# Altium PCB poria_khosravi.PcbDoc
Units mm, origin at the board's own origin, x right, y up, seen from the top; angles counter-clockwise.
Board outline 94.23 x 46.48 mm, 2 copper layers (Top Layer, Bottom Layer); 26 components, 22 nets, 110 pads, 12 vias.
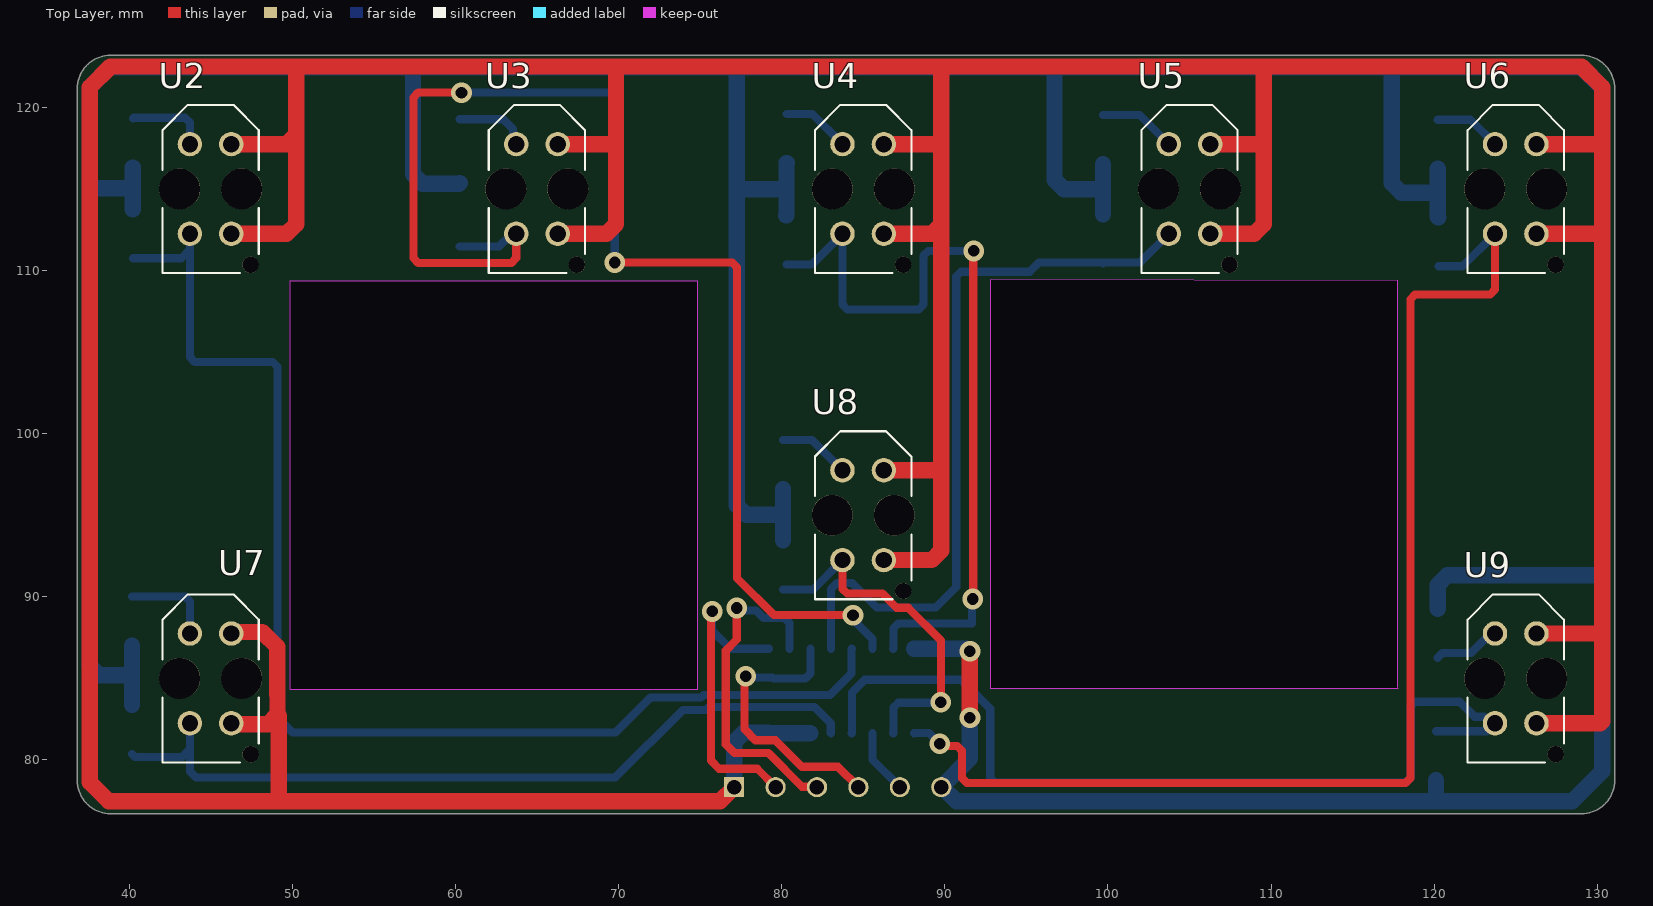
[diagram p0: Top Layer view]
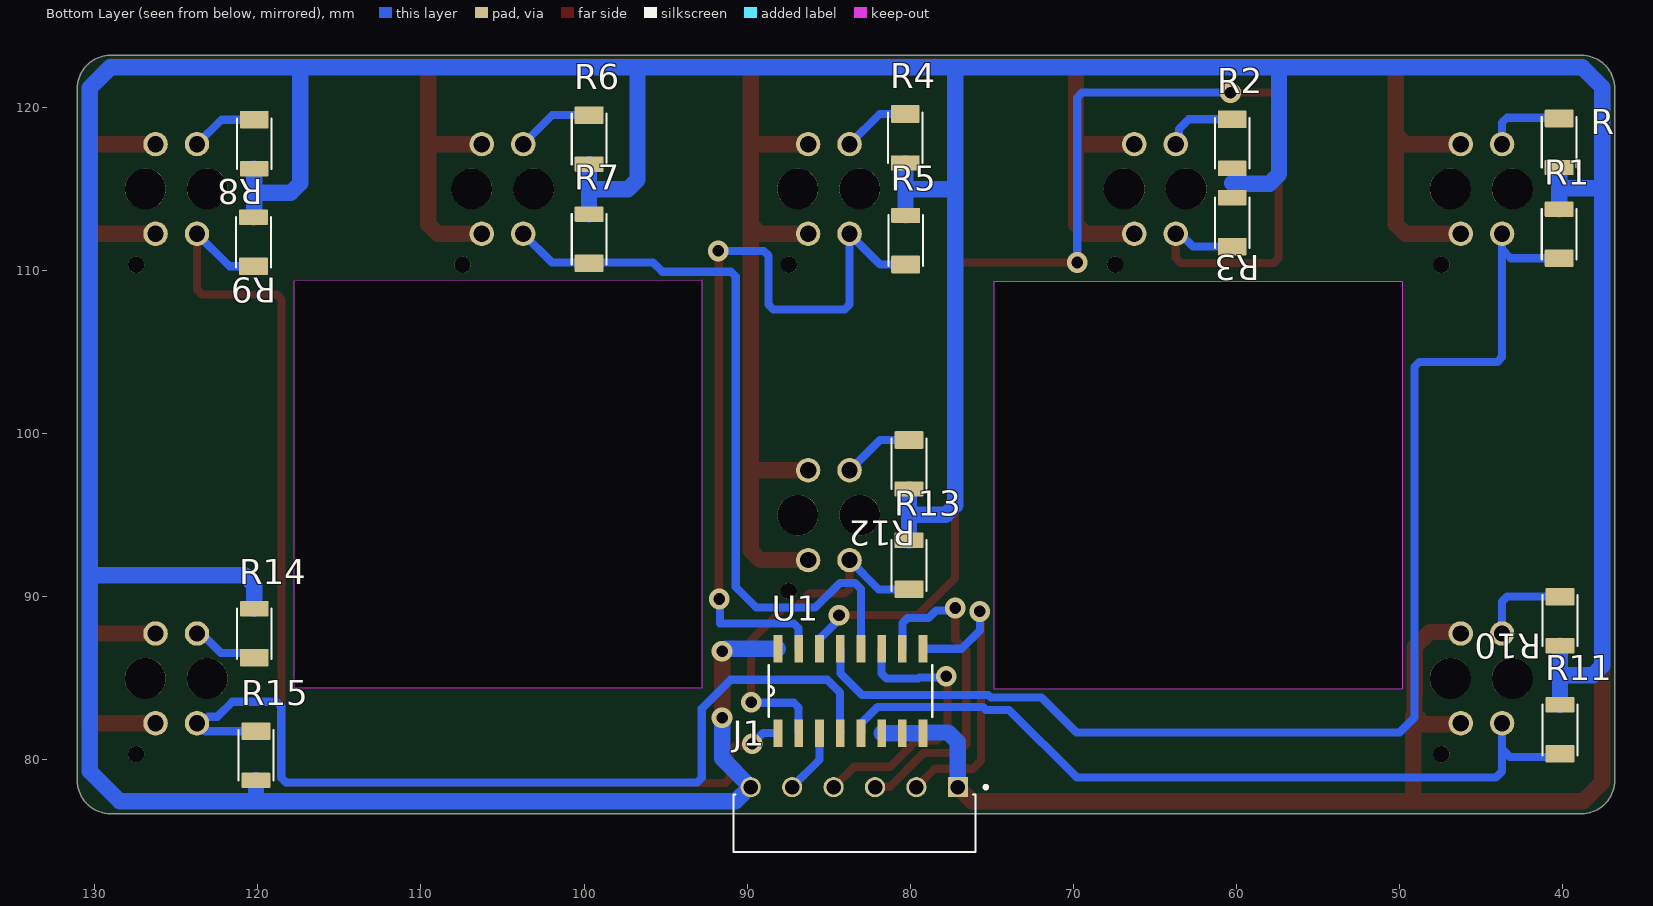
[diagram p1: Bottom Layer view, seen from below]
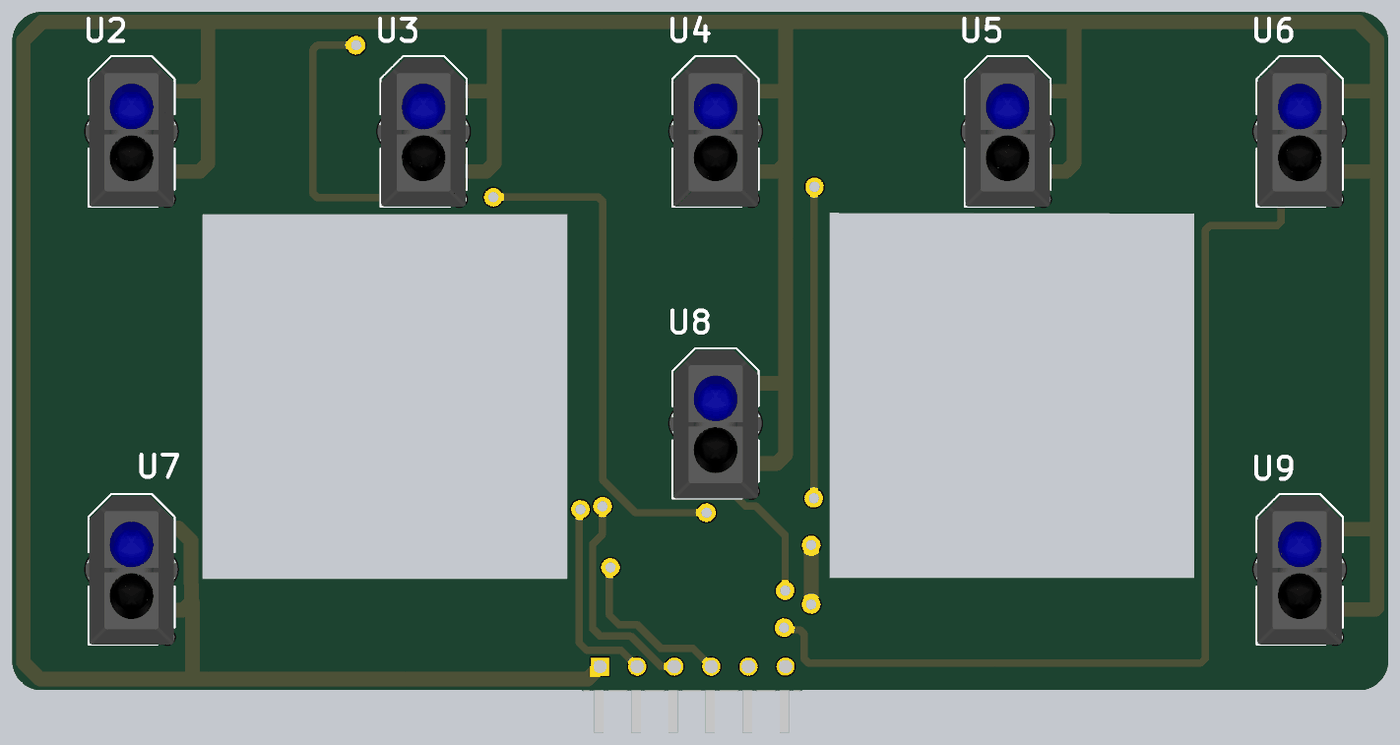
[diagram p2: 3D render of the assembled board from above, using the file's embedded part models]
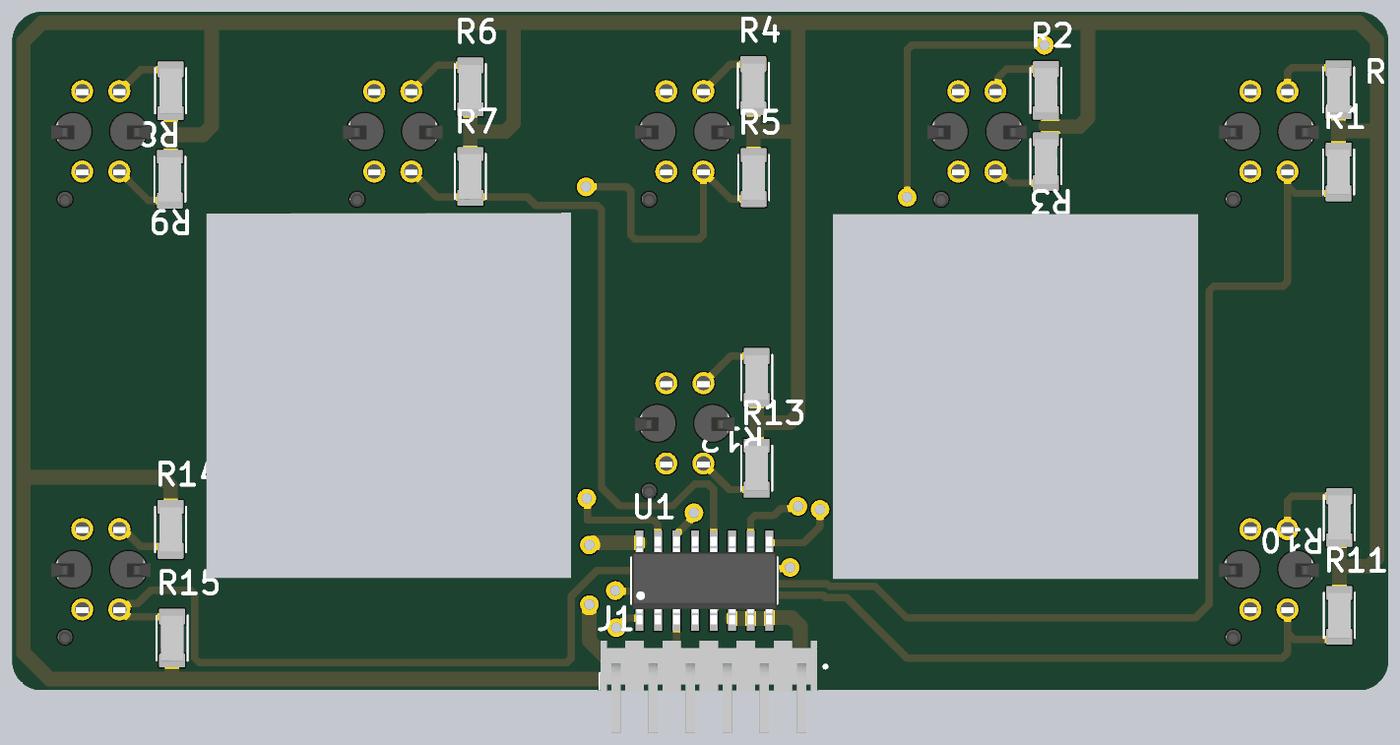
[diagram p3: 3D render of the assembled board from below, using the file's embedded part models]

## Layer stack, top to bottom
Top Solder: solder mask 0.0102, Solder Resist, Dk 3.5
Top Layer: signal copper 0.0356
Dielectric 1: dielectric 0.32, FR-4, Dk 4.8
Bottom Layer: signal copper 0.0356
Bottom Solder: solder mask 0.0102, Solder Resist, Dk 3.5

## Board outline
36.83,78.74 36.83,121.158 cw(c38.862,121.158) 38.862,123.19 129.032,123.19 cw(c129.032,121.158) 131.064,121.158 131.064,78.74 cw(c129.032,78.74) 129.032,76.708 38.862,76.708 cw(c38.862,78.74)
cut-out: 92.786,109.423 92.786,84.404 117.805,84.404 117.764,84.446 117.764,109.378
cut-out: 49.835,109.347 49.835,84.328 74.854,84.328 74.854,109.347

## Design rules (kind name [scope] priority, off if disabled: settings)
Clearance [All] p1: gap=0.254 ignorepadtopadclearanceinfootprint=FALSE except(0: Arc-Hole Track-Hole SMDPad-Hole THPad-Hole Via-Hole Fill-Hole Poly-Hole Region-Hole Text-Hole)
PolygonConnect [All] p1: connectstyle=Relief reliefconductorwidth=0.254 reliefentries=4 polygonreliefangle="90 Angle" airgapwidth=0.254
RoutingVias [All] p1: holewidth=0.711 width=1.27 viastyle="Through Hole" minholewidth=0.711 minwidth=1.27 maxholewidth=0.711 maxwidth=1.27
SolderMaskExpansion [All] p1: expansion=0.102 istentingtop=FALSE
Width [All] p1: maxlimit=2 minlimit=0.5 preferedwidth=1 minimp=50.000000 maximp=50.000000 favimp=50.000000
30 further rules are at their usual default settings.

## Components (designator, comment, footprint, x,y, rotation, side; value= is the part's Value field where it differs from the comment)
J1 "5-2267064-6" TE_5-2267064-6 77.089,78.334 r0 bottom
R "2-1879462-9" RESC3115X65N 40.234,117.856 r270 bottom
R1 "2-1879462-9" RESC3115X65N 40.234,112.217 r90 bottom
R2 "2-1879462-9" RESC3115X65N 60.274,117.805 r270 bottom
R3 "2-1879462-9" RESC3115X65N 60.274,112.928 r90 bottom
R4 "2-1879462-9" RESC3115X65N 80.315,118.135 r270 bottom
R5 "2-1879462-9" RESC3115X65N 80.289,111.836 r90 bottom
R6 "2-1879462-9" RESC3115X65N 99.695,118.059 r270 bottom
R7 "2-1879462-9" RESC3115X65N 99.695,111.912 r90 bottom
R8 "2-1879462-9" RESC3115X65N 120.218,117.78 r270 bottom
R9 "2-1879462-9" RESC3115X65N 120.269,111.726 r90 bottom
R10 "2-1879462-9" RESC3115X65N 40.183,88.544 r270 bottom
R11 "2-1879462-9" RESC3115X65N 40.183,81.839 r90 bottom
R12 "2-1879462-9" RESC3115X65N 80.086,98.146 r270 bottom
R13 "2-1879462-9" RESC3115X65N 80.086,91.923 r90 bottom
R14 "2-1879462-9" RESC3115X65N 120.218,87.732 r90 bottom
R15 "2-1879462-9" RESC3115X65N 120.117,80.289 r270 bottom
U1 "74HC4051D" SOIC127P600X175-16N 83.668,84.226 r90 bottom
U2 "TCRT5000" OPTO_TCRT5000 45,115 r90 top locked
U3 "TCRT5000" OPTO_TCRT5000 65,115 r90 top locked
U4 "TCRT5000" OPTO_TCRT5000 85,115 r90 top locked
U5 "TCRT5000" OPTO_TCRT5000 105,115 r90 top locked
U6 "TCRT5000" OPTO_TCRT5000 125,115 r90 top locked
U7 "TCRT5000" OPTO_TCRT5000 45,85 r90 top locked
U8 "TCRT5000" OPTO_TCRT5000 85,95 r90 top locked
U9 "TCRT5000" OPTO_TCRT5000 125,85 r90 top

## Footprints (in the part's own frame and the unit in brackets; to place one, negate y for a bottom-side part, rotate by r counter-clockwise, add the part's x,y. Pads: shape width x height; smd on the part's side, far side on the other; paste and mask are expansions set on the pad)
OPTO_TCRT5000 [mm]
  round 1.5 hole 1: A(2.75,1.27) CATH(2.75,-1.27) COLL(-2.75,1.27) E(-2.75,-1.27)
  round 1 hole 1 unplated: ""(-4.65,-2.45)
  round 2.5 hole 2.5 unplated: ""(0,1.9) ""(0,-1.9)
  silkscreen extent -5.15,-2.95 5.15,2.95, body extent -5.16,-3.4 5.04,3.4, height 7.2
RESC3115X65N [mm]
  rrect14% 1.09x1.77 smd: 1(-1.465,0)
  rrect14% 0.94x1.77 smd: 2(1.54,0)
  silkscreen extent -1.55,-1.06 1.55,1.06, body extent -1.55,-0.77 1.55,0.77, height 0.53
SOIC127P600X175-16N [mil]
  rect 67x21 smd: 1(-102,175) 2(-102,125) 3(-102,75) 4(-102,25) 5(-102,-25) 6(-102,-75) 7(-102,-125) 8(-102,-175) 9(102,-175) 10(102,-125) 11(102,-75) 12(102,-25) 13(102,25) 14(102,75) 15(102,125) 16(102,175)
  silkscreen extent -62,-197 62,197, body extent -118,-195 118,195, height 69
TE_5-2267064-6 [mil]
  rect 48.78x48.78 hole 35: 1(0,0)
  round 48.78 hole 35: 2(100,0) 3(200,0) 4(300,0) 5(400,0) 6(500,0)
  silkscreen extent -72,-4 542,157, body extent -45,-70 539,178, height 212

## Part data
J1: Package=None, Availability=Unavailable, MP=5-2267064-6, Price=None
R R1 R2 R3 R4 R5 R6 R7 R8 R9 R10 R11 R12 R13 R14 R15: "RES 0.24 OHM 1% 1/4W 1206", Package=1206, Power_Rating=".25 W", Resistance=24, Tolerance=1%, Availability=Unavailable, EU_RoHS_Compliance="Compliant with Exemptions", MF="TE Connectivity", MP=2-1879462-9, Price=None, SnapEDA_Link=https://www.snapeda.com/parts/2-1879462-9/TE%20Connectivity/view-part/2213899/?ref=snap
U1: "1 Circuit IC Switch 8:1 130Ohm 16-SOIC", Package="SOIC-16 Toshiba", Availability="In Stock", Check_prices=https://www.snapeda.com/parts/74HC4051D/Toshiba/view-part/?ref=eda, MF=Toshiba, MP=74HC4051D, Price=None, Purchase-URL=https://pricing.snapeda.com/search/part/74HC4051D/?ref=eda, SnapEDA_Link=https://www.snapeda.com/parts/74HC4051D/Toshiba/view-part/?ref=snap
U2 U3 U4 U5 U6 U7 U8 U9: "950 nm 60 mA Through Hole Reflective Optical Sensor with Transistor Output", Package=None, Availability=Unavailable, MP=TCRT5000, Price=None

## Via types
v1: diameter 1.27, hole 0.711, Top Layer to Bottom Layer, 12 vias

## Nets (pads, with @x,y where several pads share a name; then routed paths per layer and width w, separated by ;. In a path a pad name is that pad's centre, name@x,y a point inside that pad or via, vN(x,y) a via of type N, cw(c..) or ccw(c..) an arc to the next point about the centre after c; other vN are vias at no path point)
+5: J1.6 R1.2 R2.2 R3.2 R4.2 R5.2 R6.2 R7.2 R8.2 R9.2 R10.2 R11.2 R12.2 R13.2 R14.2 R15.2 R.2 U1.16 | length 325.5
  Top Layer w1: v1(91.542,82.588) v1(91.542,86.665)
  Bottom Layer w1: R11.2 40.183,85.192 ; R10.2 40.183,85.192 ; R1.2 40.234,115.037 ; R.2 40.234,115.037 ; 60.274,115.367 60.223,115.316 57.99,115.316 57.404,115.902 57.404,122.453 ; R13.2 80.086,95.034 ; R12.2 80.086,95.034 ; R5.2 80.302,113.389 80.302,114.986 ; R4.2 80.302,116.583 80.302,114.986 ; U1.16 91.316,86.817 91.469,86.665 v1(91.542,86.665) ; v1(91.542,82.588) 91.542,80.086 J1.6 89.854,78.334 90.717,77.47 120.117,77.47 ; R7.2 99.695,114.986 ; R6.2 99.695,114.986 ; R15.2 120.117,77.47 ; R14.2 120.218,90.727 120.804,91.313 130.302,91.313 ; R8.2 120.218,114.768 ; R9.2 120.248,113.266 120.218,113.296 120.218,114.768 ; 37.592,115.113 37.592,121.234 38.811,122.453 57.404,122.453 ; 37.592,115.113 37.592,85.777 38.178,85.192 40.183,85.192 ; 37.592,115.113 37.668,115.037 40.234,115.037 ; 57.404,122.453 77.419,122.453 ; 77.241,115.072 77.241,122.276 77.419,122.453 ; 77.241,115.072 77.241,95.62 77.827,95.034 80.086,95.034 ; 77.241,115.072 77.327,114.986 80.302,114.986 ; 77.419,122.453 96.723,122.453 ; 96.723,122.453 117.475,122.453 ; 96.723,122.453 96.723,115.572 97.309,114.986 99.695,114.986 ; 117.475,122.453 129.032,122.453 130.302,121.183 130.302,91.313 ; 117.475,122.453 117.399,122.377 117.399,115.354 117.985,114.768 120.218,114.768 ; 120.117,77.47 128.473,77.47 130.302,79.299 130.302,91.313
GND: J1.1 U1.6 U1.7 U1.8 U2.CATH U2.E U3.CATH U3.E U4.CATH U4.E U5.CATH U5.E U6.CATH U6.E U7.CATH U7.E U8.CATH U8.E U9.CATH U9.E | length 352.2
  Top Layer w1: U7.E@46.189,82.169 U7.E@46.214,82.194 ; U7.E U7.E@46.214,82.194 ; U7.CATH 46.366,87.846 48.171,87.846 49.081,86.936 49.081,84.016 49.098,83.998 49.098,82.78 ; U2.E 49.655,112.25 50.241,112.836 50.241,118.336 ; U2.CATH 49.655,117.75 50.241,118.336 ; U3.E 69.264,112.25 69.85,112.836 69.85,117.657 ; U3.CATH 69.757,117.75 69.85,117.657 ; 71.628,77.47 49.174,77.47 ; 71.629,77.471 76.226,77.471 J1.1 J1.1@77.076,78.346 ; U8.E 89.203,92.25 89.789,92.836 89.789,98.044 ; U8.CATH 89.495,97.75 89.789,98.044 ; U4.E 89.203,112.25 89.789,112.836 ; U4.CATH 89.658,117.75 89.789,117.619 ; U5.E 108.964,112.25 109.55,112.836 109.55,117.958 ; U5.CATH 109.343,117.75 109.55,117.958 ; U9.E 130.18,82.25 130.302,82.372 130.302,87.833 ; U9.CATH 130.219,87.75 130.302,87.833 ; U6.E 130.193,112.25 130.302,112.141 ; U6.CATH 130.12,117.75 130.302,117.932 ; U7.E@46.214,82.194 48.512,82.194 49.098,82.78 ; 49.098,82.78 49.174,82.704 49.174,77.47 ; 49.174,77.47 38.76,77.47 37.592,78.638 37.592,121.234 38.862,122.504 50.165,122.504 ; 50.165,122.504 69.875,122.504 ; 50.165,122.504 50.241,122.428 50.241,118.336 ; 69.85,117.657 69.85,122.479 69.875,122.504 ; 69.875,122.504 89.687,122.504 ; 89.687,122.504 109.703,122.504 ; 89.687,122.504 89.789,122.403 89.789,117.619 ; 89.789,98.044 89.789,112.836 ; 89.789,112.836 89.789,117.619 ; 109.55,117.958 109.55,122.352 109.703,122.504 ; 109.703,122.504 129.032,122.504 130.302,121.234 130.302,117.932 ; 130.302,87.833 130.302,112.141 ; 130.302,112.141 130.302,117.932
  Bottom Layer w0.5: U7.E U7.E@46.541,82.25
  Bottom Layer w1: J1.1 77.089,81.101 77.675,81.686 79.172,81.686 U1.8 U1.7 U1.6
NetR2_1: R2.1 U3.A | length 4.5
  Bottom Layer w0.5: R2.1 62.958,119.27 63.544,118.685 63.544,117.936 U3.A
NetR4_1: R4.1 U4.A | length 4.2
  Bottom Layer w0.5: R4.1 81.88,119.6 U4.A
NetR6_1: R6.1 U5.A | length 4.8
  Bottom Layer w0.5: R6.1 101.956,119.524 U5.A
NetR8_1: R8.1 U6.A | length 4.1
  Bottom Layer w0.5: R8.1 122.235,119.245 U6.A
NetR10_1: R10.1 U7.A | length 5.6
  Bottom Layer w0.5: R10.1 43.437,90.009 43.73,89.717 U7.A
NetR12_1: R12.1 U8.A | length 4.4
  Bottom Layer w0.5: R12.1 81.869,99.611 U8.A
NetR14_1: R14.1 U9.A | length 4.1
  Bottom Layer w0.5: R14.1 120.513,86.562 122.271,86.562 123.459,87.75 U9.A
NetR_1: R.1 U2.A | length 5
  Bottom Layer w0.5: R.1 40.279,119.366 43.437,119.366 43.73,119.073 U2.A
Out1: R1.1 U1.13 U2.COLL | length 77
  Bottom Layer w0.5: R1.1 43.197,110.752 43.73,111.285 ; U2.COLL 43.73,111.285 ; U1.13 84.286,86.8 84.286,85.302 82.974,83.99 75.228,83.99 75.063,83.824 71.962,83.824 69.825,81.686 50.013,81.686 49.098,82.601 49.098,104.101 48.805,104.394 44.023,104.394 43.73,104.687 43.73,111.285
Out2: R3.1 U1.14 U3.COLL | length 81.7
  Top Layer w0.5: v1(60.376,120.904) 57.722,120.904 57.429,120.611 57.429,110.757 57.722,110.465 63.437,110.465 63.73,110.757 U3.COLL ; v1(69.774,110.49) 76.974,110.49 77.267,110.197 77.267,91.135 79.527,88.875 v1(84.379,88.875)
  Bottom Layer w0.5: R3.1 62.673,111.463 63.459,112.25 U3.COLL ; v1(60.376,120.904) 69.481,120.904 69.774,120.611 v1(69.774,110.49) ; v1(84.379,88.875) 84.526,88.727 84.526,88.448 85.573,87.401 U1.14
Out3: R5.1 U1.15 U4.COLL | length 49
  Top Layer w0.5: v1(91.719,89.865) 91.745,89.891 91.745,111.176 v1(91.77,111.201)
  Bottom Layer w0.5: R5.1 81.851,110.371 U4.COLL 83.73,107.913 84.023,107.62 88.404,107.62 88.697,107.913 88.697,110.908 88.99,111.201 v1(91.77,111.201) ; U1.15 86.859,86.834 86.859,88.074 87.152,88.367 91.675,88.367 91.675,89.821 v1(91.719,89.865)
Out4: R7.1 U1.12 U5.COLL | length 45.8
  Bottom Layer w0.5: U1.12 83.033,90.486 83.402,90.856 84.32,90.856 85.829,89.346 89.448,89.346 90.703,90.602 90.703,109.634 90.996,109.927 95.208,109.927 95.779,110.498 99.644,110.498 R7.1 99.746,110.498 101.978,110.498 U5.COLL
Out5: R9.1 U1.1 U6.COLL | length 75.3
  Top Layer w0.5: v1(89.687,81.001) 89.835,80.853 90.766,80.853 91.059,80.56 91.059,78.88 91.352,78.588 118.249,78.588 118.542,78.88 118.542,108.241 118.835,108.534 123.437,108.534 123.73,108.827 U6.COLL
  Bottom Layer w0.5: U1.1 88.129,81.652 88.129,81.661 89.027,81.661 v1(89.687,81.001) ; R9.1 121.741,110.261 U6.COLL
Out6: R11.1 U1.5 U7.COLL | length 49
  Bottom Layer w0.5: R11.1 40.369,80.188 43.256,80.188 43.73,80.662 ; U7.COLL 43.73,80.662 ; U1.5 83.016,81.652 83.016,82.237 82.017,83.236 75.541,83.236 75.375,83.07 73.951,83.07 69.799,78.918 44.099,78.918 43.73,79.287 43.73,80.662
Out7: R13.1 U1.2 U8.COLL | length 21.9
  Top Layer w0.5: U8.COLL 83.73,90.488 84.023,90.195 86.185,90.195 87.051,89.329 87.759,89.329 89.764,87.325 v1(89.764,83.541)
  Bottom Layer w0.5: R13.1 81.938,90.458 U8.COLL ; U1.2 86.859,81.652 86.859,83.213 87.152,83.506 89.729,83.506 v1(89.764,83.541)
Out8: R15.1 U1.4 U9.COLL | length 56
  Bottom Layer w0.5: U1.4 84.319,81.652 84.319,84.142 85.09,84.912 91.034,84.912 92.786,83.16 92.786,78.906 93.079,78.613 118.274,78.613 118.567,78.906 118.567,83.273 118.86,83.566 121.564,83.566 122.479,82.652 123.058,82.652 U9.COLL@123.459,82.25 ; R15.1 123.227,81.754 123.723,82.25 U9.COLL
OutM: J1.5 U1.3 | length 4
  Bottom Layer w0.5: U1.3 85.573,80.01 J1.5
S1: J1.4 U1.11 | length 17.4
  Top Layer w0.5: v1(77.8,85.129) 77.718,85.047 77.718,81.884 78.398,81.204 79.629,81.204 81.255,79.578 83.464,79.578 J1.4
  Bottom Layer w0.5: v1(77.8,85.129) 77.874,85.055 79.435,85.055 79.493,84.998 81.47,84.998 81.763,85.291 U1.11
S2: J1.3 U1.10 | length 20.5
  Top Layer w0.5: v1(77.252,89.314) 77.252,87.391 76.579,86.718 76.579,80.94 77.102,80.416 79.197,80.416 81.256,78.357 82.145,78.357 J1.3
  Bottom Layer w0.5: v1(77.252,89.314) 77.399,89.167 78.422,89.167 78.887,88.702 80.183,88.702 80.493,88.392 U1.10
S3: J1.2 U1.9 | length 18.9
  Top Layer w0.5: v1(75.743,89.103) 75.667,89.027 75.667,79.959 76.169,79.457 78.505,79.457 J1.2
  Bottom Layer w0.5: v1(75.743,89.103) 75.743,87.935 76.86,86.817 U1.9
pads on no net: U2. U3. U4. U5. U6. U7. U8. U9.

## Silkscreen, mask and mechanical layers (free items; w line width, h text height)
Mechanical 1:
  the board outline again, w0.254
Mechanical 13:
  lines w0.254: 49.854,84.328 74.854,84.328 74.854,109.328 49.854,109.328 49.854,84.328 ; 92.786,84.455 117.786,84.455 117.786,109.455 92.786,109.455 92.786,84.455